# Altium PCB Barun Gas Control Top Panel V3.PcbDoc
Units mm, origin at the board's own origin, x right, y up, seen from the top; angles counter-clockwise.
Board outline 170.27 x 120.29 mm, 2 copper layers (Top Layer, Bottom Layer); 5 components, 0 nets, 6 pads, 0 vias.
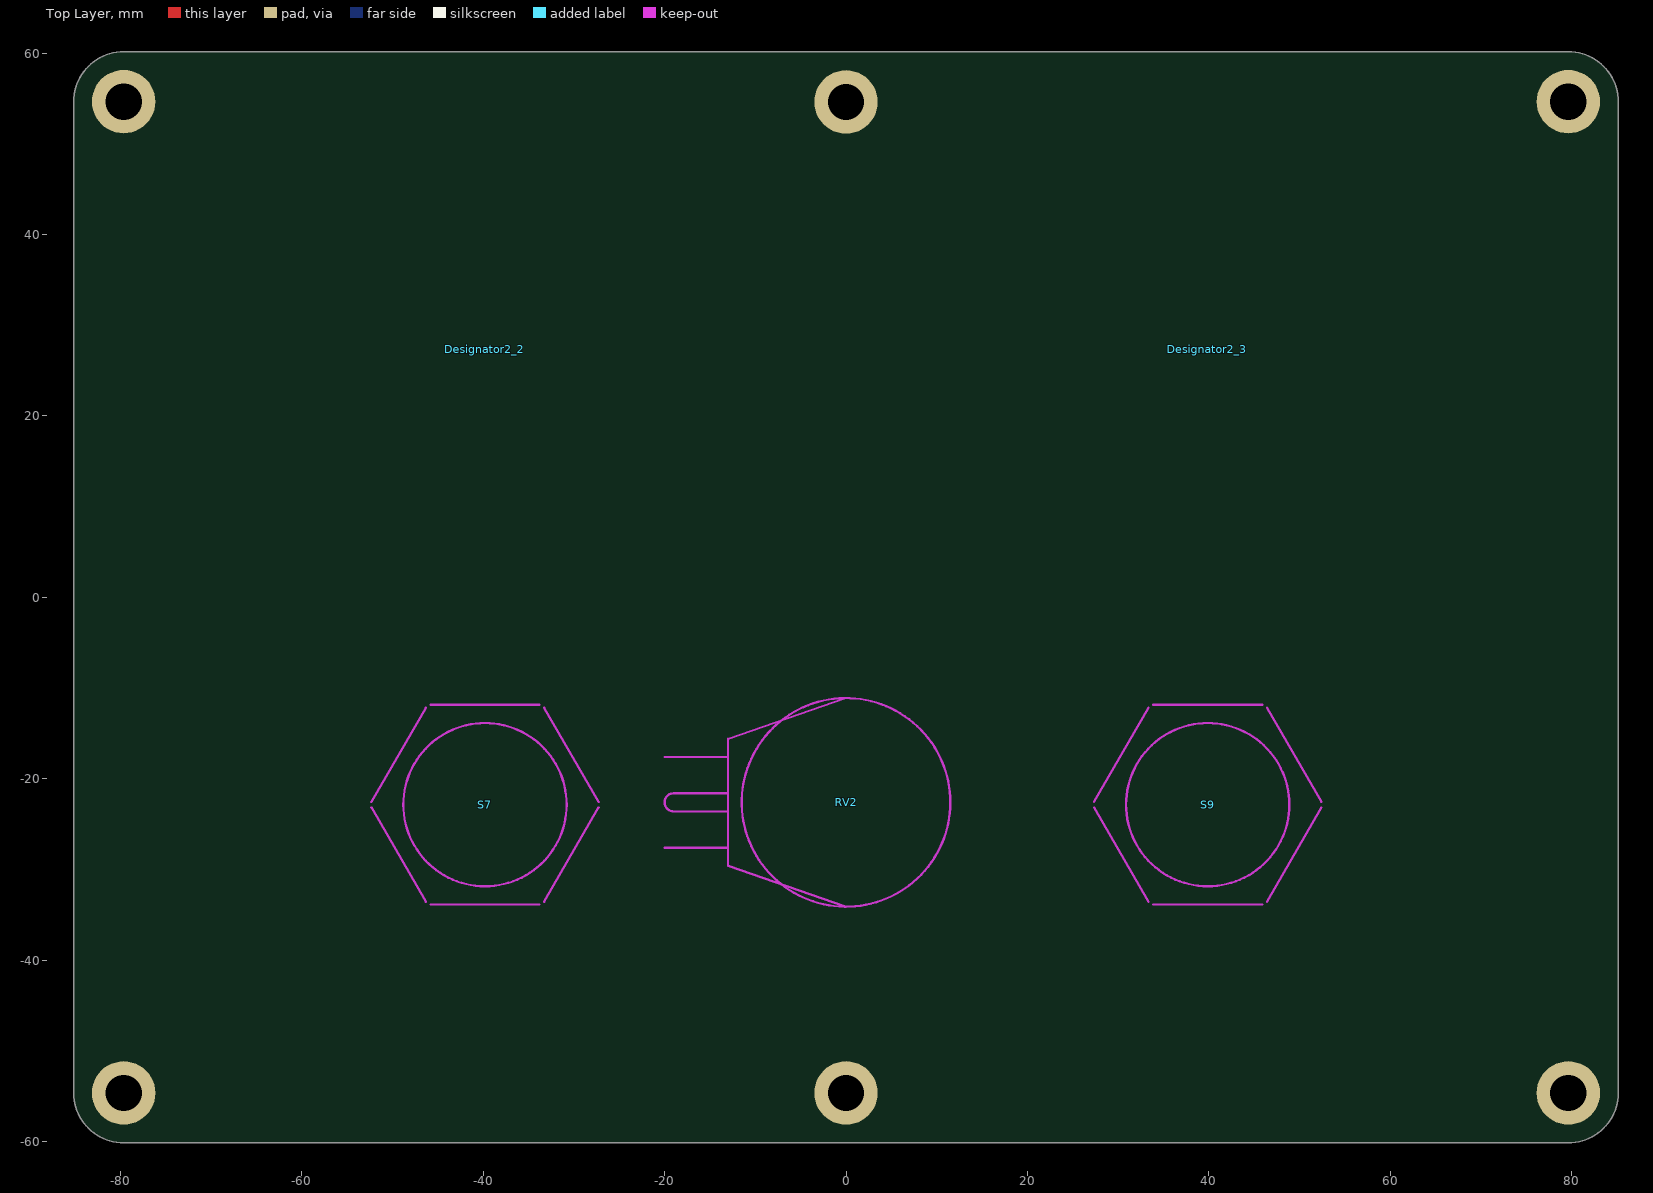
[diagram p0: Top Layer view]
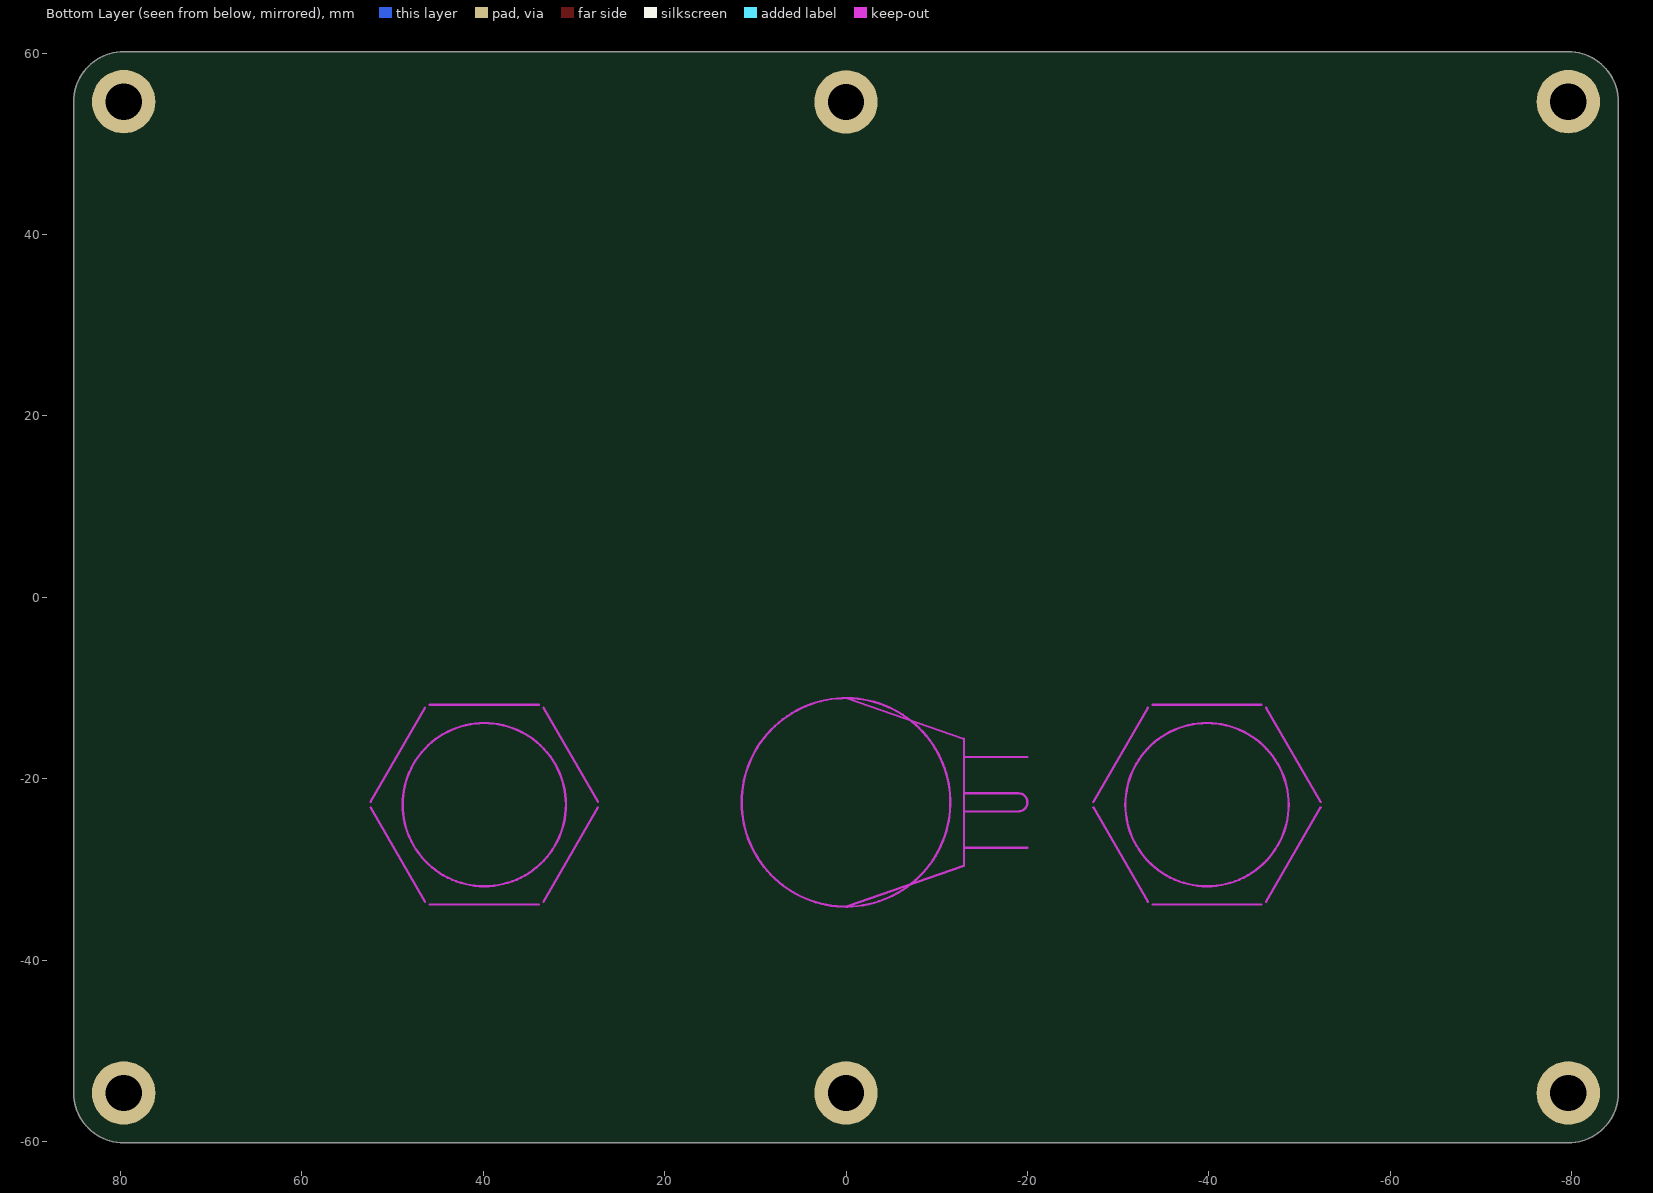
[diagram p1: Bottom Layer view, seen from below]

## Layer stack, top to bottom
Top Solder: solder mask 0.0102, Solder Resist, Dk 3.5
Top Layer: signal copper 0.0356
Dielectric 1: dielectric 0.32, FR-4, Dk 4.8
Bottom Layer: signal copper 0.0356
Bottom Solder: solder mask 0.0102, Solder Resist, Dk 3.5

## Board outline
-85.137,-54.644 -85.137,54.644 cw(c-79.637,54.644) -79.637,60.144 79.637,60.144 cw(c79.637,54.644) 85.137,54.644 85.137,-54.644 cw(c79.637,-54.644) 79.637,-60.144 -79.637,-60.144 cw(c-79.637,-54.644)

## Design rules (kind name [scope] priority, off if disabled: settings)
Clearance [All] p1: gap=0.254 ignorepadtopadclearanceinfootprint=FALSE except(0: Arc-Hole Track-Hole SMDPad-Hole THPad-Hole Via-Hole Fill-Hole Poly-Hole Region-Hole Text-Hole)
PolygonConnect [All] p1: connectstyle=Relief reliefconductorwidth=0.254 reliefentries=4 polygonreliefangle="90 Angle" airgapwidth=0.254
RoutingVias [All] p1: holewidth=0.711 width=1.27 viastyle="Through Hole" minholewidth=0.711 minwidth=1.27 maxholewidth=0.711 maxwidth=1.27
SolderMaskExpansion [All] p1: expansion=0.102
Width [All] p1: maxlimit=0.254 minlimit=0.254 preferedwidth=0.254
30 further rules are at their usual default settings.

## Components (designator, comment, footprint, x,y, rotation, side; value= is the part's Value field where it differs from the comment)
Designator2_2 "Comment" "STD BEZEL" -39.801,27.326 r0 top
Designator2_3 "Comment" "STD BEZEL" 39.801,27.326 r180 top
RV2 "Comment" POTENTIOMETER 0,-22.606 r270 top
S7 "Comment" "18MM BUTTON" -39.801,-22.86 r0 top
S9 "Comment" "18MM BUTTON" 39.878,-22.86 r0 top

## Footprints (in the part's own frame and the unit in brackets; to place one, negate y for a bottom-side part, rotate by r counter-clockwise, add the part's x,y. Pads: shape width x height; smd on the part's side, far side on the other; paste and mask are expansions set on the pad)
"18MM BUTTON" [mm] "BUGLIN MP0045/1D2"
  Keep-Out Layer circle w0.254: c0,0 r9
  Keep-Out Layer lines w0.254: -12.526,-0.304 -6.526,-10.696 ; -12.526,0.304 -6.526,10.696 ; -6,-11 6,-11 ; -6,11 6,11 ; 6.526,-10.696 12.526,-0.304 ; 6.526,10.696 12.526,0.304
POTENTIOMETER [mm] "TYCO TW1103KA (Farnell 1502913)"
  Keep-Out Layer circle w0.254: c0,0 r11.5
  Keep-Out Layer lines w0.254: 5,-20 5,-13 0,-13 -5,-13 -5,-20 ; 1,-13 1,-19 cw(c0,-19) -1,-19 -1,-18 -1,-13 ; 11.5,0 7,-13 -7,-13 -11.5,0
"STD BEZEL" [mm]

## Free pads (board coordinates)
  round 7 hole 4: 0(-79.637,-54.644) 0(-79.637,54.644) 0(0,-54.644) 0(0,54.61) 0(79.637,-54.644) 0(79.637,54.644)

## Nets (pads, with @x,y where several pads share a name; then routed paths per layer and width w, separated by ;. In a path a pad name is that pad's centre, name@x,y a point inside that pad or via, vN(x,y) a via of type N, cw(c..) or ccw(c..) an arc to the next point about the centre after c; other vN are vias at no path point)

## Silkscreen, mask and mechanical layers (free items; w line width, h text height)
Mechanical 1:
  lines w0.125: -62.801,27.326 -62.661,27.326 ; 62.661,27.326 62.801,27.326 ; -39.801,40.826 -39.801,40.826 ; 39.801,40.826 39.801,40.826
Mechanical 2:
  circle w0.254: c-79.637,54.644 r2
  circle w0.254: c79.637,-54.644 r2
  circle w0.254: c79.637,54.644 r2
  circle w0.254: c-79.637,-54.644 r2
  circle w0.254: c0,-54.644 r2
  circle w0.254: c0,54.61 r2
  circle w0.254: c0,-22.606 r5
  region: 3.055,-5.409 4.24,-5.536 5.414,-5.748 6.569,-6.043 7.7,-6.419 8.801,-6.875 9.867,-7.409 10.893,-8.017 11.872,-8.697 12.8,-9.445 13.673,-10.258 14.485,-11.13 15.233,-12.059 15.913,-13.038 16.522,-14.063 17.055,-15.129 17.512,-16.231 17.938,-17.55 18.028,-17.909 17.96,-18.017 14.489,-18.724 14.362,-18.249 13.869,-16.861 13.375,-15.791 12.799,-14.762 12.145,-13.782 11.415,-12.857 10.615,-11.991 9.749,-11.191 8.824,-10.461 7.844,-9.807 6.815,-9.231 5.745,-8.737 4.639,-8.329 3.504,-8.009 2.348,-7.779 1.178,-7.641 0,-7.594 -1.178,-7.641 -2.348,-7.779 -3.504,-8.009 -4.639,-8.329 -5.745,-8.737 -6.815,-9.231 -7.844,-9.807 -8.824,-10.461 -9.749,-11.191 -10.615,-11.991 -11.415,-12.857 -12.145,-13.782 -12.799,-14.762 -13.375,-15.791 -13.84,-16.799 -13.958,-16.752 -13.785,-16.231 -13.329,-15.129 -12.795,-14.063 -12.187,-13.038 -11.507,-12.059 -10.759,-11.13 -9.946,-10.258 -9.074,-9.445 -8.145,-8.697 -7.166,-8.017 -6.141,-7.409 -5.075,-6.875 -3.973,-6.419 -2.842,-6.043 -1.687,-5.748 -0.513,-5.536 0.672,-5.409 1.863,-5.366
  lines w0.2: -1.905,-22.606 0,-22.606 ; 0,-24.511 0,-22.606 ; 0,-20.701 0,-22.606 ; 1.905,-22.606 0,-22.606 ; 14.489,-18.724 18.051,-17.999
  lines w0.254: 14.489,-18.724 ccw(c0,-22.606) -14.489,-18.724 cw(c1.863,-22.067) 18.051,-17.999 ; -85.137,-54.644 ccw(c-79.637,-54.644) -79.637,-60.144 79.637,-60.144 ccw(c79.637,-54.644) 85.137,-54.644 85.137,54.644 ccw(c79.637,54.644) 79.637,60.144 -79.637,60.144 ccw(c-79.637,54.644) -85.137,54.644 -85.137,-54.644
Mechanical 3:
  lines w0.2: -79.637,-48.644 -79.637,0 -79.637,48.644 -79.375,48.644 ; -73.66,54.61 -39.37,54.61 ; -73.637,-54.61 -40.64,-54.61 -6,-54.61 ; -40.64,54.61 -6,54.61 ; 6,-54.61 40.64,-54.61 ; 6,54.61 40.64,54.61 73.637,54.61 ; 39.37,-54.61 73.66,-54.61 ; 79.637,-48.644 79.637,0 79.637,48.644
  lines w0.254: -79.637,-48.644 cw(c-79.637,-54.644) -73.637,-54.644 ; -79.637,48.644 ccw(c-79.637,54.644) -73.637,54.644 ; -6,-54.61 cw(c0,-54.61) 6,-54.61 ; -6,54.61 ccw(c0,54.61) 6,54.61 ; 73.637,-54.644 cw(c79.637,-54.644) 79.637,-48.644 ; 73.637,54.644 ccw(c79.637,54.644) 79.637,48.644
  text "%" at -11.43,22.86 h15
  text "%" at 68.172,22.86 h15
  text "TARGET" at -54.61,0 h15
  text "CURRENT" at 25.4,0 h15
  text "PID" at -46.76,-45.72 h15
  text "SET" at -7.62,-45.72 h15
  text "MANUAL" at 22.107,-45.72 h15
Mechanical 4:
  drawing of 2464 lines, arcs and shapes, not listed

## Text inside footprints (layer, text, board x,y; h text height)
RV2: Mechanical 2 "CUT" at 1,-19.856 h2 r270; Mechanical 2 "OUT" at -3,-19.856 h2 r270
S7: Mechanical 2 "CUT OUT" at -46.301,-23.86 h2
S9: Mechanical 2 "CUT OUT" at 33.378,-23.86 h2